# Altium PCB mergedPCBs.PcbDoc (part 4 of 4)
Units mil, origin at the board's own origin, x right, y up, seen from the top; angles counter-clockwise.
Board outline 7880 x 8510 mil, 2 copper layers (Top Layer, Bottom Layer); 381 components, 0 nets, 1142 pads, 205 vias.
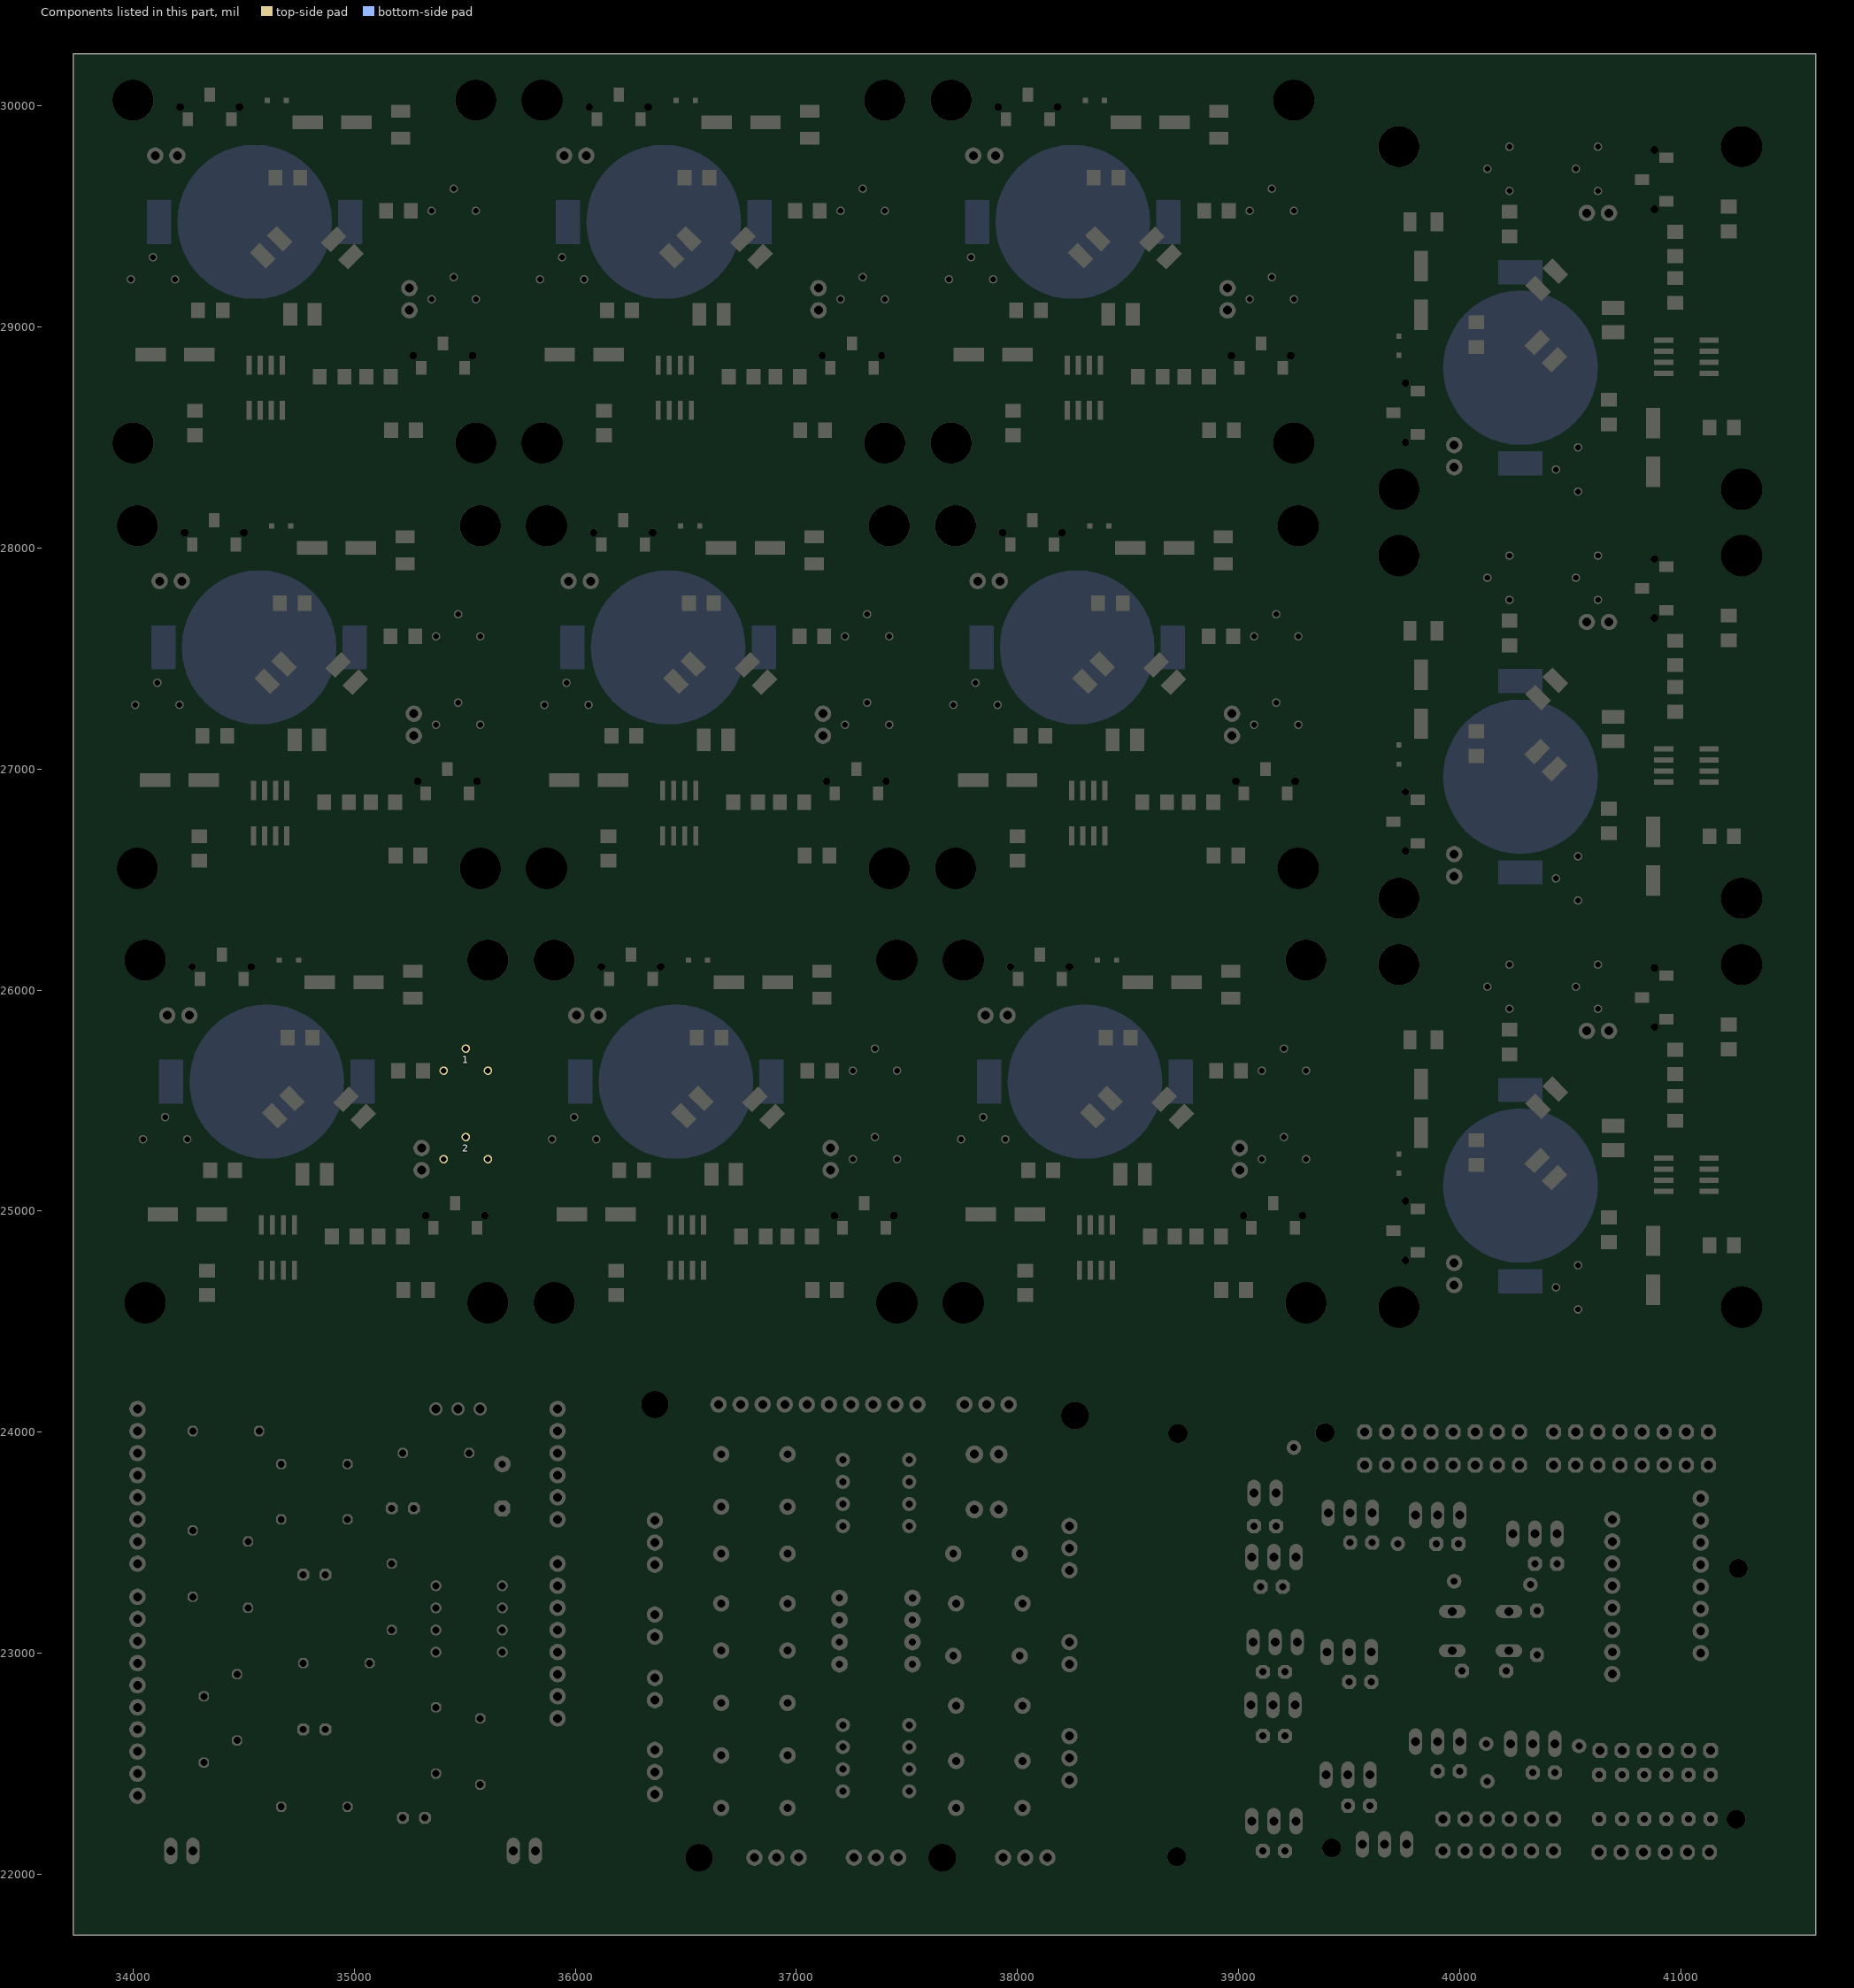
[diagram p4: the components of this part, seen from the top]

## Via types
v1: diameter 41.59/41.59 (per signal layer), hole 25.59, Top Layer to Bottom Layer, 168 vias
v2: diameter 34/34 (per signal layer), hole 20, Top Layer to Bottom Layer, 25 vias
v3: diameter 53.15/66 (per signal layer), hole 35.43, Top Layer to Bottom Layer, 12 vias

## Nets (pads, with @x,y where several pads share a name; then routed paths per layer and width w, separated by ;. In a path a pad name is that pad's centre, name@x,y a point inside that pad or via, vN(x,y) a via of type N, cw(c..) or ccw(c..) an arc to the next point about the centre after c; other vN are vias at no path point) (continued)
copper on no net: (continued)
  Top Layer w50: 39109.87,22105.22 39099.87,22105.22 39059.87,22145.22 39059.87,22240.22 39059.87,22355.22 39109.87,22405.22 39109.87,22625.22 39109.87,22630.22 39059.87,22680.22 39059.87,22760.22 39054.87,22765.22 39054.87,22860.22 39109.87,22915.22 39104.87,22915.22 39069.87,22950.22 39069.87,23045.22 39064.87,23050.22 39064.87,23085.22 39114.87,23135.22 39114.87,23285.22 39099.87,23300.22 39094.87,23300.22 39059.87,23335.22 39059.87,23435.22 39059.87,23565.22 39069.87,23575.22 39069.87,23725.22 39069.87,23765.22 39124.87,23820.22 39414.87,23820.22 39504.87,23730.22 ; 39169.87,23725.22 39169.87,23575.22 39259.87,23535.22 39259.87,23435.22 39259.87,23345.22 39214.87,23300.22 39199.87,23300.22 39264.87,23235.22 39264.87,23050.22 39264.87,22970.22 39209.87,22915.22 39209.87,22905.22 39254.87,22860.22 39254.87,22765.22 39254.87,22670.22 39209.87,22625.22 39209.87,22405.22 39259.87,22355.22 39259.87,22240.22 ; 39209.87,22105.22 39254.87,22150.22 39259.87,22150.22 39259.87,22240.22 ; 39494.87,22310.22 39494.87,22450.22 39494.87,22865.22 39499.87,22870.22 39499.87,23005.22 39499.87,23495.22 39504.87,23500.22 39504.87,23635.22 39504.87,23730.22 ; 39559.87,22135.22 39559.87,22215.22 ; 39604.87,23635.22 39604.87,23500.22 39604.87,23010.22 39599.87,23005.22 39599.87,22870.22 39599.87,22455.22 39594.87,22450.22 39594.87,22310.22 ; 39899.87,22465.22 39899.87,22600.22 39904.87,22605.22 39904.87,22630.22 39729.87,22805.22 39729.87,23315.22 39894.87,23480.22 39894.87,23495.22 39899.87,23500.22 39899.87,23625.22 39899.87,23680.22 39849.87,23730.22 ; 39999.87,23625.22 39999.87,23500.22 39994.87,23495.22 39994.87,23470.22 39814.87,23290.22 39814.87,22920.22 ; 40009.87,22920.22 39814.87,22920.22 ; 40224.87,22250.22 40229.87,22255.22 40229.87,22455.22 40184.87,22500.22 40069.87,22500.22 40034.87,22465.22 39999.87,22465.22 ; 40324.87,22250.22 40429.87,22355.22 40429.87,22460.22 40429.87,22590.22 40689.87,22850.22 40689.87,22905.22 40689.87,23005.22 40684.87,23010.22 40629.87,23010.22 40569.87,23070.22 40569.87,23340.22 ; 40329.87,22460.22 40329.87,22590.22 40329.87,22625.22 40484.87,22780.22 40484.87,23260.22 40339.87,23405.22 40339.87,23540.22 40334.87,23545.22 40344.87,23555.22 40344.87,23730.22 ; 40439.87,23540.22 40439.87,23405.22 40504.87,23405.22 40569.87,23340.22 ; 40689.87,23505.22 40739.87,23505.22 40794.87,23560.22 40794.87,23640.22 40704.87,23730.22 40344.87,23730.22 ; 40689.87,23605.22 40661.87,23577.22 40660.05,23577.22 40617.87,23535.04 40617.87,23475.4 40660.05,23433.22 40661.87,23433.22 40689.87,23405.22 40674.87,23420.22 40569.87,23340.22 ; 39259.87,22240.22 39284.87,22215.22 39559.87,22215.22 ; 39504.87,23730.22 39849.87,23730.22 ; 39559.87,22215.22 39594.87,22250.22 39594.87,22310.22 ; 39594.87,22310.22 39814.87,22310.22 39879.87,22375.22 39944.87,22375.22 40024.87,22455.22 40024.87,22465.22 39999.87,22465.22 ; 39814.87,22920.22 39814.87,22845.22 39994.87,22665.22 39994.87,22605.22 39999.87,22600.22 39999.87,22465.22 ; 39849.87,23730.22 40344.87,23730.22
  Bottom Layer w16: 34100,29492.32 34112.9,29479.42 34117.32,29475 ; 34120,27567.32 34132.9,27554.42 34137.32,27550 ; 34155,25602.32 34167.9,25589.42 34172.32,25585 ; v1@34553.05,29974.56 v1(34558.94,29974.56) ; v1@34573.05,28049.56 v1(34578.94,28049.56) ; v1@34608.05,26084.56 v1(34613.94,26084.56) ; 34950,29507.68 34982.68,29475 ; 34970,27582.68 35002.68,27550 ; 35005,25617.68 35037.68,25585 ; 35315,23050 35390,23050 35600,23260 35690,23260 35720,23230 ; 35950,29492.32 35962.9,29479.42 35967.32,29475 ; 35970,27567.32 35982.9,27554.42 35987.32,27550 ; 36005,25602.32 36017.9,25589.42 36022.32,25585 ; v1@36403.05,29974.56 v1(36408.94,29974.56) ; v1@36423.05,28049.56 v1(36428.94,28049.56) ; v1@36458.05,26084.56 v1(36463.94,26084.56) ; 36800,29507.68 36832.68,29475 ; 36820,27582.68 36852.68,27550 ; 36855,25617.68 36887.68,25585 ; 37800,29492.32 37812.9,29479.42 37817.32,29475 ; 37820,27567.32 37832.9,27554.42 37837.32,27550 ; 37855,25602.32 37867.9,25589.42 37872.32,25585 ; v1@38253.05,29974.56 v1(38258.94,29974.56) ; v1@38273.05,28049.56 v1(38278.94,28049.56) ; v1@38308.05,26084.56 v1(38313.94,26084.56) ; 38650,29507.68 38682.68,29475 ; 38670,27582.68 38702.68,27550 ; 38705,25617.68 38737.68,25585 ; 39769.87,23850.22 39769.87,23855.22 ; v1@39775.44,25118.05 v1(39775.44,25123.94) ; v1@39775.44,26968.05 v1(39775.44,26973.94) ; v1@39775.44,28818.05 v1(39775.44,28823.94) ; 39924.87,22105.22 39924.87,22245.22 ; 39924.87,22250.22 39924.87,22245.22 ; 39929.87,22245.22 39924.87,22245.22 ; 40019.87,22110.22 40024.87,22110.22 ; 40024.87,22105.22 40024.87,22110.22 ; 40024.87,22250.22 40024.87,22110.22 ; 40119.87,22245.22 40124.87,22245.22 ; 40124.87,22105.22 40124.87,22245.22 ; 40124.87,22250.22 40124.87,22245.22 ; 40242.32,25515 40275,25547.68 ; 40242.32,27365 40275,27397.68 ; 40242.32,29215 40275,29247.68 ; 40257.68,24665 40270.58,24677.9 40275,24682.32 ; 40257.68,26515 40270.58,26527.9 40275,26532.32 ; 40257.68,28365 40270.58,28377.9 40275,28382.32 ; 40424.87,23850.22 40424.87,23855.22 ; 40424.87,24000.22 40424.87,24015.22 ; 40519.87,24005.22 40519.87,24000.22 ; 40524.87,23850.22 40519.87,23850.22 40519.87,24000.22 ; 40524.87,24000.22 40519.87,24000.22 ; 40624.87,24000.22 40624.87,24005.22 ; 41024.87,23850.22 41029.87,23850.22 41029.87,24000.22 ; 41024.87,24000.22 41029.87,24000.22 ; 41029.87,24005.22 41029.87,24000.22
  Bottom Layer w24: 34100,29775 34100,29725 34050,29675 ; 34112.9,29479.42 34050,29542.32 34050,29675 ; 34120,27850 34120,27800 34070,27750 ; 34132.9,27554.42 34070,27617.32 34070,27750 ; 34155,25885 34155,25835 34105,25785 ; 34167.9,25589.42 34105,25652.32 34105,25785 ; 34200,29775 34300,29675 34350,29675 34550,29475 ; 34220,27850 34320,27750 34370,27750 34570,27550 ; 34255,25885 34355,25785 34405,25785 34605,25585 ; 34270,22105 34265,22105 34265,22630 34865,23230 34865,23350 34870,23355 34865,23365 34670,23560 34670,23605 ; 34270,24005 34280,23995 34355,23995 35307.5,23042.5 ; v1(34350,29825) 34454.17,29929.17 34507.65,29929.17 v1@34553.05,29974.56 ; v1(34370,27900) 34474.17,28004.17 34527.65,28004.17 v1@34573.05,28049.56 ; v1(34400,28975) 34500,28975 34550,29025 ; v1(34405,25935) 34509.17,26039.17 34562.65,26039.17 v1@34608.05,26084.56 ; v1(34420,27050) 34520,27050 34570,27100 ; v1(34455,25085) 34555,25085 34605,25135 ; 34570,24005 34580,23995 35630,23995 35920,23705 ; v1(34600,29075) 34550,29025 ; v1(34620,27150) 34570,27100 ; v1(34655,25185) 34605,25135 ; v1(34950,28675) 35000,28625 v1(35150,28625) ; 34950,29507.68 34950,29625 34700,29875 34700,29925 34560.8,30064.2 v1(34438.72,30064.2) 34438.72,30063.72 34300,29925 34105.77,29925 34060.27,29879.5 34054.5,29879.5 34000,29825 34000,29725 34050,29675 ; 34970,23605 35240,23605 35270,23635 35270,23650 ; v1(34970,26750) 35020,26700 v1(35170,26700) ; 34970,27582.68 34970,27700 34720,27950 34720,28000 34580.8,28139.2 v1(34458.72,28139.2) 34458.72,28138.72 34320,28000 34125.77,28000 34080.27,27954.5 34074.5,27954.5 34020,27900 34020,27800 34070,27750 ; v1(35005,24785) 35055,24735 v1(35205,24735) ; 35005,25617.68 35005,25735 34755,25985 34755,26035 34615.8,26174.2 v1(34493.72,26174.2) 34493.72,26173.72 34355,26035 34160.77,26035 34115.27,25989.5 34109.5,25989.5 34055,25935 34055,25835 34105,25785 ; 35070,22955 35075,22945 35075,22495 35315,22255 35320,22255 ; 35220,22255 35225,22255 35285,22195 35330,22195 35420,22285 35420,22930 35660,23170 35660,23200 35670,23205 ; 35220,23905 35225,23905 35800,23330 35800,23120 35915,23005 35920,23005 ; 35250,29175 35200,29175 35150,29125 v1(35100,29125) 35000,29025 34550,29025 ; 35270,23655 35270,23650 ; 35270,27250 35220,27250 35170,27200 v1(35120,27200) 35020,27100 34570,27100 ; 35305,25285 35255,25285 35205,25235 v1(35155,25235) 35055,25135 34605,25135 ; 35315,23050 35307.5,23042.5 ; 35370,22755 35315,22810 35315,23035 35307.5,23042.5 ; 35670,23105 35675,23110 35675,23090 35720,23135 35720,23230 ; 35670,23305 35615,23355 35270,23650 ; 35950,29775 35950,29725 35900,29675 ; 35962.9,29479.42 35900,29542.32 35900,29675 ; 35970,27850 35970,27800 35920,27750 ; 35982.9,27554.42 35920,27617.32 35920,27750 ; 36005,25885 36005,25835 35955,25785 ; 36017.9,25589.42 35955,25652.32 35955,25785 ; 36050,29775 36150,29675 36200,29675 36400,29475 ; 36070,27850 36170,27750 36220,27750 36420,27550 ; 36105,25885 36205,25785 36255,25785 36455,25585 ; v1(36200,29825) 36304.17,29929.17 36357.65,29929.17 v1@36403.05,29974.56 ; v1(36220,27900) 36324.17,28004.17 36377.65,28004.17 v1@36423.05,28049.56 ; v1(36250,28975) 36350,28975 36400,29025 ; v1(36255,25935) 36359.17,26039.17 36412.65,26039.17 v1@36458.05,26084.56 ; v1(36270,27050) 36370,27050 36420,27100 ; v1(36305,25085) 36405,25085 36455,25135 ; 36360,22562.5 36370,22555 36415,22510 36415,22465 36572.5,22307.5 ; 36360,22887.5 36370,22885 v2(36775,22885) ; 36360,23075 36370,23080 36415,23125 36415,23200 36370,23245 36370,23395 36360,23400 ; 36360,23600 36370,23605 36445,23605 36640,23800 37030,23800 37345,24115 37347.5,24125 ; v1(36450,29075) 36400,29025 ; v1(36470,27150) 36420,27100 ; v1(36505,25185) 36455,25135 ; v2(36565,23665) 36685,23545 36865,23545 36895,23515 36895,23380 37030,23245 v2(37030,23110) ; 36660,22300 36775,22300 37000,22075 37010,22075 ; 36660,23225 36670,23215 36670,23125 36820,22975 36820,22780 37015,22585 37015,22495 37195,22315 37225,22315 37375,22465 37510,22465 37510,22475 ; 36660,23450 36715,23395 36715,23125 36850,22990 36850,22795 37120,22525 37240,22525 37270,22555 37270,22615 37210,22675 ; v2(36730,23725) 36985,23725 37225,23485 v2(37600,23485) ; v2(36775,23845) 36835,23905 36835,24115 36847.5,24125 ; v1(36800,28675) 36850,28625 v1(37000,28625) ; 36800,29507.68 36800,29625 36550,29875 36550,29925 36410.8,30064.2 v1(36288.72,30064.2) 36288.72,30063.72 36150,29925 35955.77,29925 35910.27,29879.5 35904.5,29879.5 35850,29825 35850,29725 35900,29675 ; 36810,22075 36805,22075 36715,22165 36715,22180 36655,22240 36640,22240 36572.5,22307.5 ; v1(36820,26750) 36870,26700 v1(37020,26700) ; 36820,27582.68 36820,27700 36570,27950 36570,28000 36430.8,28139.2 v1(36308.72,28139.2) 36308.72,28138.72 36170,28000 35975.77,28000 35930.27,27954.5 35924.5,27954.5 35870,27900 35870,27800 35920,27750 ; v2(36850,23500) 36850,23035 36955,22930 36955,22780 36960,22775 ; v1(36855,24785) 36905,24735 v1(37055,24735) ; 36855,25617.68 36855,25735 36605,25985 36605,26035 36465.8,26174.2 v1(36343.72,26174.2) 36343.72,26173.72 36205,26035 36010.77,26035 35965.27,25989.5 35959.5,25989.5 35905,25935 35905,25835 35955,25785 ; v2(36895,23845) 36895,23920 36940,23965 36940,24115 36947.5,24125 ; 36960,23225 36970,23215 36970,23110 37030,23050 v2(37030,22750) ; 36960,23450 37067.5,23342.5 ; v2(37047.5,24015) 37135,24115 37147.5,24125 ; 37100,29175 37050,29175 37000,29125 v1(36950,29125) 36850,29025 36400,29025 ; v2(37120,22840) 37120,22990 37105,23005 37105,23290 37195,23380 v2(37720,23380) ; 37120,27250 37070,27250 37020,27200 v1(36970,27200) 36870,27100 36420,27100 ; 37155,25285 37105,25285 37055,25235 v1(37005,25235) 36905,25135 36455,25135 ; 37195,23050 37300,23050 37495,22855 37630,22855 37722.5,22762.5 37735,22750 37735,22675 38020,22390 38020,22300 38022.5,22300 ; 37195,23250 37195,23245 37255,23185 37255,23140 37510,22885 37690,22885 37780,22795 37780,22675 38005,22450 38050,22450 38080,22480 38080,22540 38035,22585 38035,22750 38022.5,22762.5 ; 37210,22475 37210,22480 37240,22480 37300,22540 37300,22660 37195,22765 37195,22950 37195,22960 37135,23020 37135,23275 37180,23320 37540,23320 37630,23230 37720,23230 37722.5,23225 ; 37210,22575 37210,22585 37075,22720 37075,23335 37067.5,23342.5 ; 37210,23575 37510,23575 ; 37210,23775 37210,23770 37255,23725 37540,23725 37765,23500 37765,23395 38005,23155 38005,22990 38010,22987.5 ; v2(37330,22255) 37330,22360 v2(37390,22420) ; v2(37360,22540) 37360,22600 37570,22810 v2(37615,22810) ; v2(37420,23035) 37450,23035 37525,22960 37525,22950 ; 37460,22075 37450,22075 37285,22240 36880,22240 36760,22360 36625,22360 36572.5,22307.5 ; 37510,22375 37585,22300 37722.5,22300 37810,22300 37982.5,22127.5 ; 37510,23875 37690,23875 37855,23710 37945,23710 38140,23515 38140,23320 ; 37525,23150 37525,23140 37585,23080 37585,23020 37675,22930 37690,22930 37810,22810 37810,22765 38020,22555 38020,22525 38022.5,22512.5 ; 37525,23250 37525,23245 37570,23245 37885,22930 38035,22930 38147.5,23042.5 ; 37547.5,24125 37555,24115 37555,24055 37870,23740 37960,23740 38170,23530 38170,23440 38235,23375 ; v2(37585,22360) 37795,22360 37915,22240 38050,22240 38110,22300 v2(38110,22930) ; v2(37590,22525) 37652.5,22450 37750,22450 37825,22375 v2(37975,22375) ; 37710,23450 37705,23440 37165,23440 37067.5,23342.5 ; v2(37795,22555) v2(37885,22465) ; 37800,29775 37800,29725 37750,29675 ; 37812.9,29479.42 37750,29542.32 37750,29675 ; 37820,27850 37820,27800 37770,27750 ; 37832.9,27554.42 37770,27617.32 37770,27750 ; 37855,25885 37855,25835 37805,25785 ; 37867.9,25589.42 37805,25652.32 37805,25785 ; 37900,29775 38000,29675 38050,29675 38250,29475 ; 37915,23650 37915,23455 38020,23350 38020,23230 38022.5,23225 ; 37915,23900 37915,23890 v2(38125,23680) ; 37920,27850 38020,27750 38070,27750 38270,27550 ; 37955,25885 38055,25785 38105,25785 38305,25585 ; 37960,24125 37960,23950 38230,23680 38230,23575 38235,23575 38245,23575 38245,23545 38290,23500 38290,23350 38260,23320 38140,23320 ; 38035,22075 37982.5,22127.5 ; v1(38050,29825) 38154.17,29929.17 38207.65,29929.17 v1@38253.05,29974.56 ; v1(38070,27900) 38174.17,28004.17 38227.65,28004.17 v1@38273.05,28049.56 ; v1(38100,28975) 38200,28975 38250,29025 ; v1(38105,25935) 38209.17,26039.17 38262.65,26039.17 v1@38308.05,26084.56 ; v1(38120,27050) 38220,27050 38270,27100 ; v2(38155,22450) 38230,22525 38235,22525 ; v1(38155,25085) 38255,25085 38305,25135 ; 38235,22425 38230,22420 38230,22375 37982.5,22127.5 ; 38235,22625 38230,22630 38230,22945 38235,22950 38230,22960 38147.5,23042.5 ; v1(38300,29075) 38250,29025 ; v1(38320,27150) 38270,27100 ; v1(38355,25185) 38305,25135 ; v1(38650,28675) 38700,28625 v1(38850,28625) ; 38650,29507.68 38650,29625 38400,29875 38400,29925 38260.8,30064.2 v1(38138.72,30064.2) 38138.72,30063.72 38000,29925 37805.77,29925 37760.27,29879.5 37754.5,29879.5 37700,29825 37700,29725 37750,29675 ; v1(38670,26750) 38720,26700 v1(38870,26700) ; 38670,27582.68 38670,27700 38420,27950 38420,28000 38280.8,28139.2 v1(38158.72,28139.2) 38158.72,28138.72 38020,28000 37825.77,28000 37780.27,27954.5 37774.5,27954.5 37720,27900 37720,27800 37770,27750 ; v1(38705,24785) 38755,24735 v1(38905,24735) ; 38705,25617.68 38705,25735 38455,25985 38455,26035 38315.8,26174.2 v1(38193.72,26174.2) 38193.72,26173.72 38055,26035 37860.77,26035 37815.27,25989.5 37809.5,25989.5 37755,25935 37755,25835 37805,25785 ; 38950,29175 38900,29175 38850,29125 v1(38800,29125) 38700,29025 38250,29025 ; 38970,27250 38920,27250 38870,27200 v1(38820,27200) 38720,27100 38270,27100 ; 39005,25285 38955,25285 38905,25235 v1(38855,25235) 38755,25135 38305,25135 ; v1@39775.44,25118.05 39820.83,25072.65 39820.83,25019.17 v1(39925,24915) ; v1@39775.44,26968.05 39820.83,26922.65 39820.83,26869.17 v1(39925,26765) ; v1@39775.44,28818.05 39820.83,28772.65 39820.83,28719.17 v1(39925,28615) ; 39975,24665 40025,24665 40075,24615 ; 39975,24765 40075,24865 40075,24915 40275,25115 ; 39975,26515 40025,26515 40075,26465 ; 39975,26615 40075,26715 40075,26765 40275,26965 ; 39975,28365 40025,28365 40075,28315 ; 39975,28465 40075,28565 40075,28615 40275,28815 ; 40242.32,25515 40125,25515 39875,25265 39825,25265 39685.8,25125.8 v1(39685.8,25003.72) 39686.28,25003.72 39825,24865 39825,24670.77 39870.5,24625.27 39870.5,24619.5 39925,24565 40025,24565 40075,24615 ; 40242.32,27365 40125,27365 39875,27115 39825,27115 39685.8,26975.8 v1(39685.8,26853.72) 39686.28,26853.72 39825,26715 39825,26520.77 39870.5,26475.27 39870.5,26469.5 39925,26415 40025,26415 40075,26465 ; 40242.32,29215 40125,29215 39875,28965 39825,28965 39685.8,28825.8 v1(39685.8,28703.72) 39686.28,28703.72 39825,28565 39825,28370.77 39870.5,28325.27 39870.5,28319.5 39925,28265 40025,28265 40075,28315 ; 40270.58,24677.9 40207.68,24615 40075,24615 ; 40270.58,26527.9 40207.68,26465 40075,26465 ; 40270.58,28377.9 40207.68,28315 40075,28315 ; 40575,25815 40575,25765 40625,25715 v1(40625,25665) 40725,25565 40725,25115 ; 40575,27665 40575,27615 40625,27565 v1(40625,27515) 40725,27415 40725,26965 ; 40575,29515 40575,29465 40625,29415 v1(40625,29365) 40725,29265 40725,28815 ; v1(40675,25165) 40725,25115 ; v1(40675,27015) 40725,26965 ; v1(40675,28865) 40725,28815 ; v1(40775,24965) 40775,25065 40725,25115 ; v1(40775,26815) 40775,26915 40725,26965 ; v1(40775,28665) 40775,28765 40725,28815 ; v1(41075,25515) 41125,25565 v1(41125,25715) ; v1(41075,27365) 41125,27415 v1(41125,27565) ; v1(41075,29215) 41125,29265 v1(41125,29415) ; 38140,23320 38140,23050 38147.5,23042.5
  Bottom Layer w32: 39154.87,22765.22 39198.87,22809.22 39198.87,22818.42 39231.67,22851.22 39278.07,22851.22 39443.07,22686.22 40595.14,22686.22 40721.14,22560.22 40734.87,22560.22 ; 39159.87,22240.22 39203.87,22284.22 39203.87,22293.42 39236.67,22326.22 39283.07,22326.22 39369.07,22240.22 39828.6,22240.22 39899.6,22311.22 40490.87,22311.22 40634.87,22455.22 ; 39159.87,23435.22 39203.87,23435.22 39203.87,23525.78 39228.87,23550.78 39228.87,23599.66 39194.31,23634.22 39045.43,23634.22 38965.96,23554.75 38965.96,22685.69 39181.05,22470.6 39003.87,22293.42 39003.87,22127.78 39085.43,22046.22 39234.31,22046.22 39386.31,22198.22 39503.87,22198.22 39503.87,22082.02 39536.67,22049.22 39783.07,22049.22 39838.83,22104.99 39899.6,22044.22 39950.14,22044.22 39974.87,22068.95 39999.6,22044.22 40050.14,22044.22 40074.87,22068.95 40099.6,22044.22 40150.14,22044.22 40174.87,22068.95 40199.6,22044.22 40250.14,22044.22 40350.14,22044.22 40374.87,22068.95 40399.6,22044.22 40450.14,22044.22 40485.87,22079.95 40485.87,22224.95 40652.14,22391.22 40859.31,22391.22 40918.31,22450.22 40934.87,22450.22 ; 39164.87,23050.22 39208.87,23094.22 39208.87,23103.42 39241.67,23136.22 39288.07,23136.22 39320.87,23103.42 39320.87,22965.78 39475.43,22811.22 39478.87,22811.22 39539.87,22750.22 40644.87,22750.22 40834.87,22560.22 ; 39394.87,22450.22 39438.87,22494.22 39438.87,22503.42 39471.67,22536.22 39653.87,22536.22 39834.87,22355.22 40454.87,22355.22 40544.87,22445.22 40544.87,22575.22 40539.87,22580.22 ; 39399.87,23005.22 39399.87,23050.22 39435.67,23050.22 39476.67,23091.22 39623.07,23091.22 39649.07,23065.22 39911.67,23065.22 39913.67,23067.22 40357.71,23067.22 40408.47,23016.46 40408.47,22876.62 40492.87,22792.22 41112.87,22792.22 ; 39404.87,23635.22 39445.87,23594.22 39445.87,23475.78 39670.63,23251.02 40373.91,23251.02 40626.87,22998.06 40626.87,22879.12 40663.77,22842.22 40715.97,22842.22 41073.97,23200.22 41089.87,23200.22 ; 39719.87,23495.22 39743.87,23519.22 39743.87,23678.42 39854.67,23789.22 40295.14,23789.22 40363.87,23857.95 40363.87,24025.49 40399.6,24061.22 40550.14,24061.22 40611.14,24000.22 40624.87,24000.22 ; 39799.87,23625.22 39843.87,23669.22 39843.87,23678.42 39880.67,23715.22 40394.87,23715.22 40524.87,23845.22 40524.87,23850.22 ; 39966.87,23011.22 40222.87,23011.22 40222.87,22933.22 40209.87,22920.22 ; 39966.87,23189.22 40222.87,23189.22 40346.67,23189.22 40349.47,23192.02 ; 39974.87,23325.22 39984.87,23325.22 40059.87,23400.22 40059.87,23590.22 40139.87,23670.22 40409.27,23670.22 40419.27,23680.22 40425.87,23680.22 40534.87,23789.22 40663.87,23789.22 40724.87,23850.22 ; 40119.87,22590.22 40119.87,22425.22 40124.87,22420.22 ; 40239.87,23540.22 40239.87,23583.22 40284.87,23628.22 40442.87,23628.22 40544.87,23730.22 40704.87,23730.22 40824.87,23850.22 ; 40319.87,23310.22 40434.87,23310.22 40519.87,23395.22 40519.87,23605.22 40602.87,23688.22 40749.14,23688.22 40911.14,23850.22 40924.87,23850.22 ; 40689.87,23305.22 40689.87,23316.12 40752.87,23379.12 40752.87,23608.22 40914.87,23770.22 41129.87,23770.22 41184.87,23715.22 41184.87,23456.04 41155.96,23427.13 41160.96,23313.53 41204.57,23269.91 41204.57,22769.92 41034.87,22560.22 ; 41089.87,23300.22 41094.87,23300.22 41155.96,23239.13 41160.96,22849.71 41158.16,22852.51 41112.87,22792.22 ; 41114.87,22790.22 41112.87,22792.22
  Bottom Layer w50: 39569.87,23850.22 39569.87,24000.22 ; 39669.87,23850.22 39669.87,24000.22 ; 39769.87,23855.22 39769.87,24000.22 ; 39869.87,23850.22 39869.87,24000.22 ; 39924.87,22105.22 39924.87,22250.22 ; 39969.87,23850.22 39969.87,24000.22 ; 40024.87,22105.22 40024.87,22250.22 ; 40069.87,23850.22 40069.87,24000.22 ; 40124.87,22105.22 40124.87,22250.22 ; 40169.87,23850.22 40169.87,24000.22 ; 40224.87,22250.22 40224.87,22105.22 40324.87,22105.22 40324.87,22250.22 ; 40269.87,23850.22 40269.87,24000.22 ; 40424.87,22105.22 40424.87,22250.22 ; 40424.87,23855.22 40424.87,24000.22 ; 40519.87,23850.22 40524.87,23855.22 40524.87,24000.22 ; 40624.87,23850.22 40624.87,24000.22 ; 40629.87,22100.22 40629.87,22250.22 ; 40629.87,22450.22 40634.87,22455.22 40634.87,22560.22 ; 40724.87,23850.22 40724.87,24000.22 ; 40729.87,22100.22 40734.87,22105.22 40734.87,22250.22 ; 40734.87,22450.22 40734.87,22560.22 ; 40824.87,23850.22 40824.87,24000.22 ; 40829.87,22100.22 40834.87,22105.22 40834.87,22250.22 ; 40834.87,22450.22 40834.87,22560.22 ; 40924.87,23850.22 40924.87,24000.22 ; 40929.87,22100.22 40934.87,22105.22 40934.87,22250.22 ; 40934.87,22450.22 40934.87,22560.22 ; 41024.87,23850.22 41024.87,24000.22 ; 41029.87,22100.22 41034.87,22105.22 41034.87,22250.22 ; 41034.87,22450.22 41034.87,22560.22 ; 41124.87,23850.22 41124.87,24000.22 ; 41129.87,22100.22 41134.87,22105.22 41134.87,22250.22 ; 41134.87,22450.22 41134.87,22560.22
  other v3: 38790.27,23738.42 38890.27,23738.42 38690.27,23833.42 38790.27,23833.42 38890.27,23833.42 38890.27,23933.42 38990.27,23933.42 39090.27,23933.42 38890.27,24033.42 38990.27,24033.42 39090.27,24033.42

## Polygon pours and split planes (outlines as drawn)
no net on Bottom Layer "Bottom-GND2" (solid, remove dead copper, pour order 22): 37850,28417 39200,28417 ccw(c39200,28525) 39308,28525 39308,28675 39308,29975 ccw(c39200,29975) 39200,30083 39100,30083 37800,30083 ccw(c37800,29925) 37642,29925 37642,29825 37642,28525 ccw(c37750,28525) 37750,28417
no net on Bottom Layer "Bottom-GND1" (solid, remove dead copper, pour order 20): 36000,28417 37350,28417 ccw(c37350,28525) 37458,28525 37458,28675 37458,29975 ccw(c37350,29975) 37350,30083 37250,30083 35950,30083 ccw(c35950,29925) 35792,29925 35792,29825 35792,28525 ccw(c35900,28525) 35900,28417
no net on Bottom Layer "Bottom-GND" (solid, remove dead copper, pour order 18): 34150,28417 35500,28417 ccw(c35500,28525) 35608,28525 35608,28675 35608,29975 ccw(c35500,29975) 35500,30083 35400,30083 34100,30083 ccw(c34100,29925) 33942,29925 33942,29825 33942,28525 ccw(c34050,28525) 34050,28417
no net on Bottom Layer "Bottom-GND2" (solid, remove dead copper, pour order 16): 41333,28415 41333,29765 ccw(c41225,29765) 41225,29873 41075,29873 39775,29873 ccw(c39775,29765) 39667,29765 39667,29665 39667,28365 ccw(c39825,28365) 39825,28207 39925,28207 41225,28207 ccw(c41225,28315) 41333,28315
no net on Bottom Layer "Bottom-GND1" (solid, remove dead copper, pour order 14): 41333,26565 41333,27915 ccw(c41225,27915) 41225,28023 41075,28023 39775,28023 ccw(c39775,27915) 39667,27915 39667,27815 39667,26515 ccw(c39825,26515) 39825,26357 39925,26357 41225,26357 ccw(c41225,26465) 41333,26465
no net on Bottom Layer "Bottom-GND" (solid, remove dead copper, pour order 12): 41333,24715 41333,26065 ccw(c41225,26065) 41225,26173 41075,26173 39775,26173 ccw(c39775,26065) 39667,26065 39667,25965 39667,24665 ccw(c39825,24665) 39825,24507 39925,24507 41225,24507 ccw(c41225,24615) 41333,24615
no net on Bottom Layer "Bottom-GND2" (solid, remove dead copper, pour order 10): 37870,26492 39220,26492 ccw(c39220,26600) 39328,26600 39328,26750 39328,28050 ccw(c39220,28050) 39220,28158 39120,28158 37820,28158 ccw(c37820,28000) 37662,28000 37662,27900 37662,26600 ccw(c37770,26600) 37770,26492
no net on Bottom Layer "Bottom-GND1" (solid, remove dead copper, pour order 8): 36020,26492 37370,26492 ccw(c37370,26600) 37478,26600 37478,26750 37478,28050 ccw(c37370,28050) 37370,28158 37270,28158 35970,28158 ccw(c35970,28000) 35812,28000 35812,27900 35812,26600 ccw(c35920,26600) 35920,26492
no net on Bottom Layer "Bottom-GND" (solid, remove dead copper, pour order 6): 34170,26492 35520,26492 ccw(c35520,26600) 35628,26600 35628,26750 35628,28050 ccw(c35520,28050) 35520,28158 35420,28158 34120,28158 ccw(c34120,28000) 33962,28000 33962,27900 33962,26600 ccw(c34070,26600) 34070,26492
no net on Bottom Layer "Bottom-GND2" (solid, remove dead copper, pour order 4): 37905,24527 39255,24527 ccw(c39255,24635) 39363,24635 39363,24785 39363,26085 ccw(c39255,26085) 39255,26193 39155,26193 37855,26193 ccw(c37855,26035) 37697,26035 37697,25935 37697,24635 ccw(c37805,24635) 37805,24527
no net on Bottom Layer "Bottom-GND1" (solid, remove dead copper, pour order 2): 36055,24527 37405,24527 ccw(c37405,24635) 37513,24635 37513,24785 37513,26085 ccw(c37405,26085) 37405,26193 37305,26193 36005,26193 ccw(c36005,26035) 35847,26035 35847,25935 35847,24635 ccw(c35955,24635) 35955,24527
no net on Bottom Layer "Bottom-GND" (solid, remove dead copper, pour order 0): 34205,24527 35555,24527 ccw(c35555,24635) 35663,24635 35663,24785 35663,26085 ccw(c35555,26085) 35555,26193 35455,26193 34155,26193 ccw(c34155,26035) 33997,26035 33997,25935 33997,24635 ccw(c34105,24635) 34105,24527

## Keep-outs
Keep-Out Layer:
  lines w0: 37750,30175 37800,30175 39200,30175 39350,30175 39400,30175 39400,29975 39400,28475 39400,28325 39300,28325 39200,28325 37800,28325 37750,28325 37550,28325 37450,28325 37350,28325 35950,28325 35900,28325 35700,28325 ; 37770,28250 37820,28250 39220,28250 39370,28250 39420,28250 39420,28050 39420,26550 39420,26400 39320,26400 39220,26400 37820,26400 37770,26400 37570,26400 37470,26400 37370,26400 35970,26400 35920,26400 35720,26400 ; 37805,26285 37855,26285 39255,26285 39405,26285 39455,26285 39455,26085 39455,24585 39455,24435 39355,24435 39255,24435 37855,24435 37805,24435 37605,24435 37505,24435 37405,24435 36005,24435 35955,24435 35755,24435 ; 39575,28315 39575,28365 39575,29765 39575,29915 39575,29965 39775,29965 41275,29965 41425,29965 41425,29865 41425,29765 41425,28365 41425,28315 41425,28115 41425,28015 41425,27915 41425,26515 41425,26465 41425,26265 ; 41035.27,22003.42 41231.27,22003 ; 41162.27,24100.42 41230.27,24032.8 41230.27,23594 ; 41230.27,22098.42 41230.84,22000 ; 35700,28325 35600,28325 35500,28325 34100,28325 34050,28325 33850,28325 33850,28475 33850,29925 33850,30175 34100,30175 35500,30175 35650,30175 35700,30175 35700,29975 35700,28475 35700,28325 ; 35720,26400 35620,26400 35520,26400 34120,26400 34070,26400 33870,26400 33870,26550 33870,28000 33870,28250 34120,28250 35520,28250 35670,28250 35720,28250 35720,28050 35720,26550 35720,26400 ; 35755,24435 35655,24435 35555,24435 34155,24435 34105,24435 33905,24435 33905,24585 33905,26035 33905,26285 34155,26285 35555,26285 35705,26285 35755,26285 35755,26085 35755,24585 35755,24435 ; 41425,26265 41425,26165 41425,26065 41425,24665 41425,24615 41425,24415 41275,24415 39825,24415 39575,24415 39575,24665 39575,26065 39575,26215 39575,26265 39775,26265 41275,26265 41425,26265

## Other copper
Top Layer:
  text "+" at 34018.49,29765.68 h42.5 r90
  text "+" at 35868.49,29765.68 h42.5 r90
  text "+" at 37718.49,29765.68 h42.5 r90
  text "1" at 41019,29724 h34 r90
  text "1" at 35417,29700 h51
  text "1" at 37267,29700 h51
  text "1" at 39117,29700 h51
  text "1" at 40050,29682 h51 r90
  text "2" at 40460,29646 h51 r90
  text "2" at 41022,29576 h34 r90
  text "ECE3400" at 33950,29575 h59.5
  text "ECE3400" at 35800,29575 h59.5
  text "ECE3400" at 37650,29575 h59.5
  text "out" at 40502,29455 h42.5 r90
  text "2" at 35381,29290 h51
  text "2" at 37231,29290 h51
  text "2" at 39081,29290 h51
  text "out" at 35190,29248 h42.5
  text "out" at 37040,29248 h42.5
  text "out" at 38890,29248 h42.5
  text "1" at 35459,28731 h34
  text "1" at 37309,28731 h34
  text "1" at 39159,28731 h34
  text "2" at 35311,28728 h34
  text "2" at 37161,28728 h34
  text "2" at 39011,28728 h34
  text "+" at 39984.32,28283.49 h42.5 r180
  text "ECE3400" at 40175,28215 h59.5 r90
  text "1" at 41019,27874 h34 r90
  text "+" at 34038.49,27840.68 h42.5 r90
  text "+" at 35888.49,27840.68 h42.5 r90
  text "+" at 37738.49,27840.68 h42.5 r90
  text "1" at 40050,27832 h51 r90
  text "2" at 40460,27796 h51 r90
  text "1" at 35437,27775 h51
  text "1" at 37287,27775 h51
  text "1" at 39137,27775 h51
  text "2" at 41022,27726 h34 r90
  text "ECE3400" at 33970,27650 h59.5
  text "ECE3400" at 35820,27650 h59.5
  text "ECE3400" at 37670,27650 h59.5
  text "out" at 40502,27605 h42.5 r90
  text "2" at 35401,27365 h51
  text "2" at 37251,27365 h51
  text "2" at 39101,27365 h51
  text "out" at 35210,27323 h42.5
  text "out" at 37060,27323 h42.5
  text "out" at 38910,27323 h42.5
  text "1" at 35479,26806 h34
  text "1" at 37329,26806 h34
  text "1" at 39179,26806 h34
  text "2" at 35331,26803 h34
  text "2" at 37181,26803 h34
  text "2" at 39031,26803 h34
  text "+" at 39984.32,26433.49 h42.5 r180
  text "ECE3400" at 40175,26365 h59.5 r90
  text "1" at 41019,26024 h34 r90
  text "1" at 40050,25982 h51 r90
  text "2" at 40460,25946 h51 r90
  text "+" at 34073.49,25875.68 h42.5 r90
  text "+" at 35923.49,25875.68 h42.5 r90
  text "+" at 37773.49,25875.68 h42.5 r90
  text "2" at 41022,25876 h34 r90
  text "1" at 35472,25810 h51
  text "1" at 37322,25810 h51
  text "1" at 39172,25810 h51
  text "out" at 40502,25755 h42.5 r90
  text "ECE3400" at 34005,25685 h59.5
  text "ECE3400" at 35855,25685 h59.5
  text "ECE3400" at 37705,25685 h59.5
  text "2" at 35436,25400 h51
  text "2" at 37286,25400 h51
  text "2" at 39136,25400 h51
  text "out" at 35245,25358 h42.5
  text "out" at 37095,25358 h42.5
  text "out" at 38945,25358 h42.5
  text "1" at 35514,24841 h34
  text "1" at 37364,24841 h34
  text "1" at 39214,24841 h34
  text "2" at 35366,24838 h34
  text "2" at 37216,24838 h34
  text "2" at 39066,24838 h34
  text "+" at 39984.32,24583.49 h42.5 r180
  text "ECE3400" at 40175,24515 h59.5 r90
  text "Team 8" at 36272.5,23927.5 h77.5
  text "rev1" at 36272.5,23850 h77.5
  text "Christina  Caroline" at 38783.37,22890.22 h38.25 r90
  text "Felipe   Pei-Yi" at 38821.62,22890.22 h38.25 r90
  text "Ian     Xitang" at 38859.87,22890.22 h38.25 r90
  text "ECE 3400 :D" at 38753.11,22307.25 h38.25 r90
  text "Team Firework" at 38791.36,22230.77 h38.25 r90
  text "Oneders!" at 34470,22105 h108.5
  text "Rev 1" at 34470,22005 h108.5

## Silkscreen, mask and mechanical layers (free items; w line width, h text height)
Mechanical 1:
  drawing of 208 lines, arcs and shapes, not listed
Mechanical 2:
  lines w10: 34775,28930 cw(c34775,29250) 34775,29570 cw(c34775,29250) 34775,28930 ; 34795,27005 cw(c34795,27325) 34795,27645 cw(c34795,27325) 34795,27005 ; 34830,25040 cw(c34830,25360) 34830,25680 cw(c34830,25360) 34830,25040 ; 36625,28930 cw(c36625,29250) 36625,29570 cw(c36625,29250) 36625,28930 ; 36645,27005 cw(c36645,27325) 36645,27645 cw(c36645,27325) 36645,27005 ; 36680,25040 cw(c36680,25360) 36680,25680 cw(c36680,25360) 36680,25040 ; 38475,28930 cw(c38475,29250) 38475,29570 cw(c38475,29250) 38475,28930 ; 38495,27005 cw(c38495,27325) 38495,27645 cw(c38495,27325) 38495,27005 ; 38530,25040 cw(c38530,25360) 38530,25680 cw(c38530,25360) 38530,25040 ; 40180,25340 ccw(c40500,25340) 40820,25340 ccw(c40500,25340) 40180,25340 ; 40180,27190 ccw(c40500,27190) 40820,27190 ccw(c40500,27190) 40180,27190 ; 40180,29040 ccw(c40500,29040) 40820,29040 ccw(c40500,29040) 40180,29040
  text "OFF" at 34185,29845 h77.5
  text "ON" at 34390,29845 h77.5
  text "OFF" at 36035,29845 h77.5
  text "ON" at 36240,29845 h77.5
  text "OFF" at 37885,29845 h77.5
  text "ON" at 38090,29845 h77.5
  text "F1" at 41030,29730 h42.5 r90
  text "F2" at 41030,29530 h77.5 r90
  text "F2" at 35265,28720 h77.5
  text "F1" at 35465,28720 h42.5
  text "F2" at 37115,28720 h77.5
  text "F1" at 37315,28720 h42.5
  text "F2" at 38965,28720 h77.5
  text "F1" at 39165,28720 h42.5
  text "ON" at 39905,28655 h77.5 r90
  text "OFF" at 39905,28450 h77.5 r90
  text "OFF" at 34205,27920 h77.5
  text "ON" at 34410,27920 h77.5
  text "OFF" at 36055,27920 h77.5
  text "ON" at 36260,27920 h77.5
  text "OFF" at 37905,27920 h77.5
  text "ON" at 38110,27920 h77.5
  text "F1" at 41030,27880 h42.5 r90
  text "F2" at 41030,27680 h77.5 r90
  text "ON" at 39905,26805 h77.5 r90
  text "F2" at 35285,26795 h77.5
  text "F1" at 35485,26795 h42.5
  text "F2" at 37135,26795 h77.5
  text "F1" at 37335,26795 h42.5
  text "F2" at 38985,26795 h77.5
  text "F1" at 39185,26795 h42.5
  text "OFF" at 39905,26600 h77.5 r90
  text "F1" at 41030,26030 h42.5 r90
  text "OFF" at 34240,25955 h77.5
  text "ON" at 34445,25955 h77.5
  text "OFF" at 36090,25955 h77.5
  text "ON" at 36295,25955 h77.5
  text "OFF" at 37940,25955 h77.5
  text "ON" at 38145,25955 h77.5
  text "F2" at 41030,25830 h77.5 r90
  text "ON" at 39905,24955 h77.5 r90
  text "F2" at 35320,24830 h77.5
  text "F1" at 35520,24830 h42.5
  text "F2" at 37170,24830 h77.5
  text "F1" at 37370,24830 h42.5
  text "F2" at 39020,24830 h77.5
  text "F1" at 39220,24830 h42.5
  text "OFF" at 39905,24750 h77.5 r90
  text "Digital I/O" at 39849.87,24055.22 h34
  text "Digital I/O" at 40614.87,24050.22 h34
  text "gnd" at 39646.03,23937.96 h34
  text "12" at 39875.69,23926.63 h34
  text "11" at 39987.02,23926.63 h34
  text "10" at 40075.69,23926.63 h34
  text "13" at 39775.69,23921.63 h34
  text "9" at 40174.01,23921.63 h34
  text "8" at 40274.01,23921.63 h34
  text "ARef" at 39501.97,23919.43 h34
  text "7" at 40429.01,23916.63 h34
  text "6" at 40524.01,23916.63 h34
  text "5" at 40629.01,23916.63 h34
  text "3" at 40829.01,23916.63 h34
  text "2" at 40929.01,23916.63 h34
  text "1" at 41040.34,23916.63 h34
  text "0" at 41129.01,23916.63 h34
  text "4" at 40724.01,23911.63 h34
  text "Y0" at 40920.27,23168.42 h42.5
  text "Y1" at 40925.27,23078.42 h42.5
  text "Y2" at 40925.27,22978.42 h42.5
  text "Y3" at 40925.27,22883.42 h42.5
  text "from Adafruit :D" at 41303.47,22492.77 h42.5 r90
  text "Design borrowed" at 41238.47,22482.77 h42.5 r90
  text "3v" at 40005.02,22156.63 h34
  text "5v" at 40105.02,22156.63 h34
  text "Vin" at 40401.7,22156.63 h34
  text "RST" at 39869.63,22154.43 h34
  text "Gnd" at 40225.27,22148.42 h34
  text "0" at 40615.27,22143.42 h34
  text "1" at 40715.27,22143.42 h34
  text "2" at 40815.27,22143.42 h34
  text "3" at 40915.27,22143.42 h34
  text "4" at 41015.27,22143.42 h34
  text "5" at 41120.27,22143.42 h34
  text "Analog In" at 40740.27,22018.42 h34
Mechanical 81:
  text "VDD" at 35330,24165 h62
  text "GND" at 35480,24165 h62
  text "OUT" at 35630,24165 h62
  text "C (5V)" at 35630,22165 h62
  text "E" at 35880,22165 h62
  text "C (5V)" at 34080,21965 h62
  text "E" at 34330,21965 h62

## Text inside footprints (layer, text, board x,y; h text height)
B1: Mechanical 2 "GND" at 35865.5,23225 h34; Mechanical 2 "GND" at 35865.5,23325 h34; Mechanical 2 "+5V" at 35865.5,23125 h34; Mechanical 2 "RST" at 35865.5,22925 h34; Mechanical 2 "VIN" at 35865.5,23425 h34; Mechanical 2 "+3.3V" at 35865.5,23025 h34; Mechanical 2 "0" at 35865.5,23625 h34; Mechanical 2 "1" at 35865.5,23725 h34; Mechanical 2 "2" at 35865.5,23825 h34; Mechanical 2 "3" at 35865.5,23925 h34; Mechanical 2 "4" at 35865.5,24025 h34; Mechanical 2 "5" at 35865.5,24125 h34; Mechanical 2 "GND" at 34070,22635 h34; Mechanical 2 "13" at 34070,22735 h34; Mechanical 2 "12" at 34070,22835 h34; Mechanical 2 "11" at 34070,22935 h34; Mechanical 2 "AREF" at 34070,22535 h34; Mechanical 2 "10" at 34070,23035 h34; Mechanical 2 "9" at 34070,23135 h34; Mechanical 2 "8" at 34070,23235 h34; Mechanical 2 "7" at 34070,23385 h34; Mechanical 2 "6" at 34070,23485 h34; Mechanical 2 "5" at 34070,23585 h34; Mechanical 2 "4" at 34070,23685 h34; Mechanical 2 "3" at 34070,23785 h34; Mechanical 2 "2" at 34070,23885 h34; Mechanical 2 "TX" at 34070,23985 h34; Mechanical 2 "RX" at 34070,24085 h34; Mechanical 2 "SDA" at 34070,22435 h34; Mechanical 2 "SCL" at 34070,22335 h34; Mechanical 2 "IOREF" at 35865.5,22825 h34; Mechanical 8 "RST" at 34995,24020 h17; Mechanical 8 "ISP" at 34900,24145 h17; Mechanical 8 "USB" at 34495,21370 h17; Mechanical 8 "POWER JACK" at 35595,21570 h17